# Altium PCB LEDArray8KeyRevB.PcbDoc (part 2 of 4)
Units mm, origin at the board's own origin, x right, y up, seen from the top; angles counter-clockwise.
Board outline 120 x 84.91 mm, 2 copper layers (Top Layer, Bottom Layer); 250 components, 219 nets, 891 pads, 234 vias.
Unrouted connection lines stored in the file: 34.
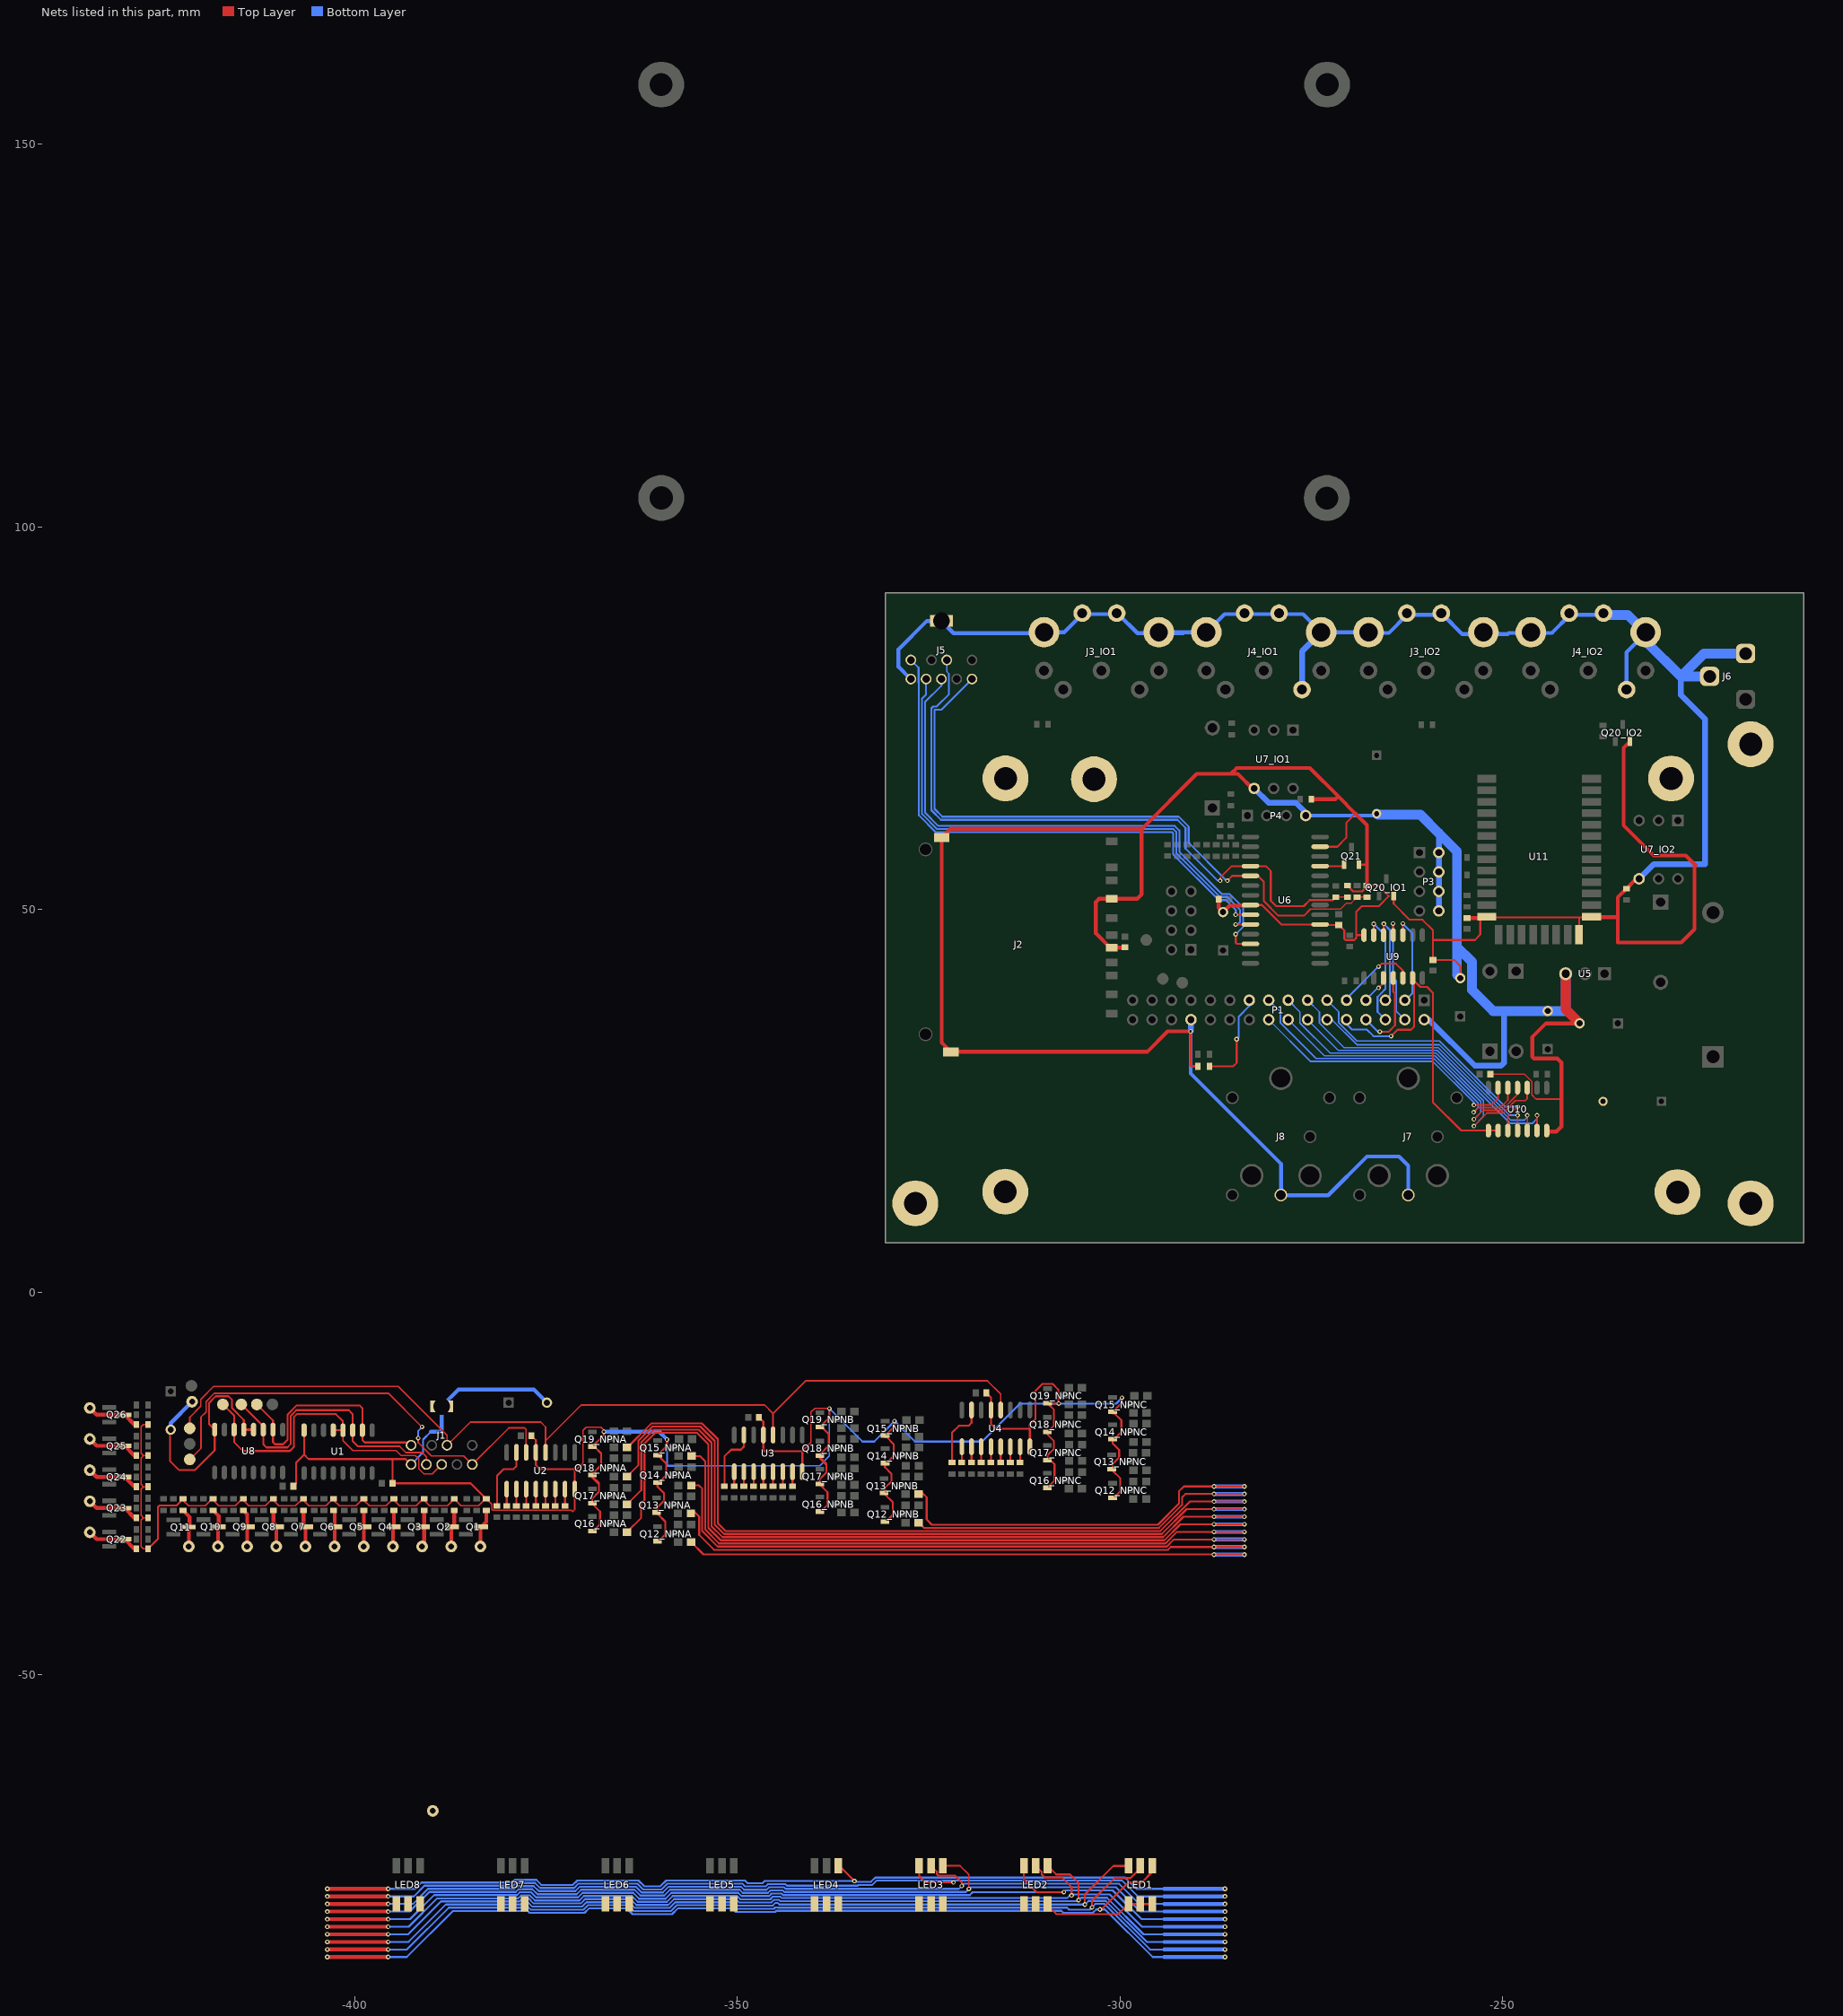
[diagram p2: the nets of this part, all layers, seen from the top]

## Via types
v1: diameter 0.6, hole 0.3, Top Layer to Bottom Layer, 234 vias

## Nets (pads, with @x,y where several pads share a name; then routed paths per layer and width w, separated by ;. In a path a pad name is that pad's centre, name@x,y a point inside that pad or via, vN(x,y) a via of type N, cw(c..) or ccw(c..) an arc to the next point about the centre after c; other vN are vias at no path point) (continued)
B: J1.3 J5.3 pad.0@-412.767,-14.649 U1.2 U6.9 U8.2 | length 104
  Top Layer w0.254: pad.0@-412.767,-14.649 -410.659,-16.757 U8.2@-410.659,-17.943 -410.659,-19.6 -410.405,-19.854 -409.34,-19.854 -408.756,-19.27 -408.756,-15.989 -407.541,-14.774 -399.356,-14.774 -398.975,-15.155 U1.2@-398.975,-18.02 -398.975,-19.321 -398.67,-19.626 -392.994,-19.626 J1.3@-392.622,-19.998 ; v1(-284.878,49.335) U6.9@-282.951,49.335
  Bottom Layer w0.254: J5.3@-327.329,82.618 -326.309,81.598 -326.309,79.669 -326.265,79.626 -326.265,62.324 -324.054,60.112 -293.166,60.112 -293.057,60.003 -293.057,57.222 -287.075,51.24 -286.148,51.24 -284.878,49.97 v1(-284.878,49.335)
B1_NPNA: R3_NPNA.1 U2.15 | length 8.6
  Top Layer w0.254: R3_NPNA.1@-381.398,-27.703 -381.398,-23.981 -380.509,-23.092 -379.239,-23.092 -378.858,-22.711 U2.15@-378.858,-20.919
B1_NPNB: R3_NPNB.1 U3.15 | length 8.7
  Top Layer w0.254: R3_NPNB.1@-351.68,-25.163 -351.68,-21.441 -350.791,-20.552 -349.521,-20.552 -349.14,-20.171 U3.15@-349.14,-18.279
B1_NPNC: R3_NPNC.1 U4.15 | length 8.7
  Top Layer w0.254: R3_NPNC.1@-321.941,-22.049 -321.941,-18.327 -321.052,-17.438 -319.782,-17.438 -319.401,-17.057 U4.15@-319.401,-15.165
B2_NPNA: R6_NPNA.1 U2.1 | length 2
  Top Layer w0.254: R6_NPNA.1@-380.128,-27.703 U2.1@-380.128,-25.719
B2_NPNB: R6_NPNB.1 U3.1 | length 2.1
  Top Layer w0.254: R6_NPNB.1@-350.41,-25.163 U3.1@-350.41,-23.079
B2_NPNC: R6_NPNC.1 U4.1 | length 2.1
  Top Layer w0.254: R6_NPNC.1@-320.671,-22.049 U4.1@-320.671,-19.965
B3_NPNA: R9_NPNA.1 U2.2 | length 2
  Top Layer w0.254: R9_NPNA.1@-378.858,-27.703 U2.2@-378.858,-25.719
B3_NPNB: R9_NPNB.1 U3.2 | length 2.1
  Top Layer w0.254: R9_NPNB.1@-349.14,-25.163 U3.2@-349.14,-23.079
B3_NPNC: R9_NPNC.1 U4.2 | length 2.1
  Top Layer w0.254: R9_NPNC.1@-319.401,-22.049 U4.2@-319.401,-19.965
B4_NPNA: R12_NPNA.1 U2.3 | length 2
  Top Layer w0.254: R12_NPNA.1@-377.588,-27.703 U2.3@-377.588,-25.719
B4_NPNB: R12_NPNB.1 U3.3 | length 2.1
  Top Layer w0.254: R12_NPNB.1@-347.87,-25.163 U3.3@-347.87,-23.079
B4_NPNC: R12_NPNC.1 U4.3 | length 2.1
  Top Layer w0.254: R12_NPNC.1@-318.131,-22.049 U4.3@-318.131,-19.965
B5_NPNA: R15_NPNA.1 U2.4 | length 2
  Top Layer w0.254: R15_NPNA.1@-376.318,-27.703 U2.4@-376.318,-25.719
B5_NPNB: R15_NPNB.1 U3.4 | length 2.1
  Top Layer w0.254: R15_NPNB.1@-346.6,-25.163 U3.4@-346.6,-23.079
B5_NPNC: R15_NPNC.1 U4.4 | length 2.1
  Top Layer w0.254: R15_NPNC.1@-316.861,-22.049 U4.4@-316.861,-19.965
B6_NPNA: R18_NPNA.1 U2.5 | length 2
  Top Layer w0.254: R18_NPNA.1@-375.048,-27.703 U2.5@-375.048,-25.719
B6_NPNB: R18_NPNB.1 U3.5 | length 2.1
  Top Layer w0.254: R18_NPNB.1@-345.33,-25.163 U3.5@-345.33,-23.079
B6_NPNC: R18_NPNC.1 U4.5 | length 2.1
  Top Layer w0.254: R18_NPNC.1@-315.591,-22.049 U4.5@-315.591,-19.965
B7_NPNA: R21_NPNA.1 U2.6 | length 2
  Top Layer w0.254: R21_NPNA.1@-373.778,-27.703 U2.6@-373.778,-25.719
B7_NPNB: R21_NPNB.1 U3.6 | length 2.1
  Top Layer w0.254: R21_NPNB.1@-344.06,-25.163 U3.6@-344.06,-23.079
B7_NPNC: R21_NPNC.1 U4.6 | length 2.1
  Top Layer w0.254: R21_NPNC.1@-314.321,-22.049 U4.6@-314.321,-19.965
B8_NPNA: R24_NPNA.1 U2.7 | length 2
  Top Layer w0.254: R24_NPNA.1@-372.508,-27.703 U2.7@-372.508,-25.719
B8_NPNB: R24_NPNB.1 U3.7 | length 2.1
  Top Layer w0.254: R24_NPNB.1@-342.79,-25.163 U3.7@-342.79,-23.079
B8_NPNC: R24_NPNC.1 U4.7 | length 2.1
  Top Layer w0.254: R24_NPNC.1@-313.051,-22.049 U4.7@-313.051,-19.965
BL_CNT: Q21.2 U6.25 | length 3.2
  Top Layer w0.254: U6.25@-273.851,55.685 -270.879,55.685 Q21.2@-270.698,55.866
C: J1.4 J5.4 pad.0@-414.799,-14.649 U1.3 U6.10 U8.3 | length 108.1
  Top Layer w0.203: -408.79,-20.261 -408.349,-19.82 -408.349,-16.157 ; -394.862,-20.134 -394.098,-20.134 -393.28,-20.952 -391.154,-20.952 -390.622,-21.484 J1.4@-390.622,-22.498
  Top Layer w0.254: pad.0@-414.799,-14.649 -411.929,-17.519 U8.3@-411.929,-17.943 -411.929,-19.854 -411.522,-20.261 -408.79,-20.261 ; -408.349,-16.157 -407.601,-15.409 -400.753,-15.409 -400.245,-15.917 U1.3@-400.245,-18.02 -400.245,-19.448 -399.559,-20.134 -394.862,-20.134 ; v1(-284.878,48.065) U6.10@-282.951,48.065
  Bottom Layer w0.254: J5.4@-325.329,80.118 -325.329,78.117 -325.859,77.588 -325.859,62.493 -323.885,60.519 -292.997,60.519 -292.65,60.172 -292.65,57.39 -286.907,51.647 -285.979,51.647 -284.294,49.961 -284.294,48.395 -284.624,48.065 v1(-284.878,48.065)
CLK: J1.2 J5.2 pad.0@-421.538,-17.78 R76.2 R77.2 U2.12 U3.12 U4.12 U6.4 | length 215.4
  Top Layer w0.178: -272.19,51.24 -271.797,51.633 -270.285,51.633 R77.2@-270.273,51.621
  Top Layer w0.203: pad.0@-421.538,-17.78 -421.538,-16.321 -420.109,-14.892 -420.109,-13.982 -418.46,-12.332 -418.428,-12.332 -418.389,-12.293 -394.318,-12.293 -387.922,-18.69 -387.922,-19.998 -384.883,-16.959 -375.683,-16.959 -375.048,-17.594 -375.048,-19.378 ; U2.12@-375.048,-20.919 -375.048,-19.378 ; U3.12@-345.319,-18.647 -345.319,-15.805 ; U4.12@-315.583,-15.381 -315.583,-13.305 -317.314,-11.574 -341.088,-11.574 -345.319,-15.805 ; -375.048,-19.378 -370.393,-14.724 -346.427,-14.724 -345.346,-15.805 -345.319,-15.805
  Top Layer w0.254: v1(-286.91,53.78) -286.91,54.161 -285.386,55.685 U6.4@-282.951,55.685 -280.941,55.685 -280.293,55.037 -280.293,51.161 -279.585,50.453 -275.996,50.453 -275.209,51.24 -272.19,51.24 -272.164,51.24 R76.2@-271.797,51.608
  Bottom Layer w0.178: J5.2@-322.629,82.618 -322.629,81.093 -322.343,80.806
  Bottom Layer w0.254: -322.343,80.806 -322.343,78.164 -323.968,76.539 -324.402,76.539 -324.64,76.301 -324.64,62.998 -323.38,61.738 -292.492,61.738 -291.431,60.677 -291.431,57.987 -287.224,53.78 v1(-286.91,53.78)
COM1: LED1.1 LED1.3 LED1.5 LED2.1 LED2.3 LED2.5 LED3.1 LED3.3 LED3.5 LED4.1 LED4.3 LED4.5 LED5.1 LED5.3 LED5.5 LED6.1 LED6.3 LED6.5 LED7.1 LED7.3 LED7.5 LED8.1 LED8.3 LED8.5 pad.1@-383.557,-33.215 pad.1@-389.78,-67.759 Q1.3 R47.2 | length 19.9
  Top Layer w0.254: LED2.5@-309.458,-79.93 -309.458,-80.11 -308.322,-81.246 -300.207,-81.246 LED1.1@-298.891,-79.93 LED1.3@-297.341,-79.93 LED1.5@-295.791,-79.93
  Top Layer w0.508: pad.1@-383.557,-33.215 -383.557,-30.76 Q1.3@-383.446,-30.649 -382.795,-29.998 R47.2@-382.795,-28.504
COM2: pad.1@-387.367,-33.215 Q2.3 R48.2 | length 4.9
  Top Layer w0.508: pad.1@-387.367,-33.215 -387.367,-30.76 Q2.3@-387.256,-30.649 -386.986,-30.379 R48.2@-386.986,-28.504
COM3: pad.1@-391.177,-33.215 Q3.3 R49.2 | length 4.8
  Top Layer w0.508: pad.1@-391.177,-33.215 -390.923,-32.961 R49.2@-390.923,-28.504
COM4: pad.1@-394.987,-33.215 Q4.3 R50.2 | length 4.8
  Top Layer w0.508: pad.1@-394.987,-33.215 -394.987,-30.776 Q4.3@-394.86,-30.649 ; Q4.3@-394.876,-30.649 Q4.3@-394.86,-30.649 ; R50.2@-394.86,-28.504 Q4.3@-394.86,-30.649
COM5: pad.1@-398.797,-33.215 Q5.3 R51.2 | length 5
  Top Layer w0.152: Q5.3@-398.797,-30.76 -398.797,-30.649 -398.797,-30.539 Q5.3@-398.686,-30.649 Q5.3@-398.797,-30.76
  Top Layer w0.508: pad.1@-398.797,-33.215 Q5.3@-398.797,-30.76 ; Q5.3@-398.797,-30.539 R51.2@-398.797,-28.504
COM6: pad.1@-402.607,-33.215 Q6.3 R52.2 | length 4.8
  Top Layer w0.508: R52.2@-402.734,-28.504 -402.607,-28.631 pad.1@-402.607,-33.215
COM7: pad.1@-406.417,-33.215 Q7.3 R53.2 | length 4.8
  Top Layer w0.508: R53.2@-406.671,-28.504 -406.671,-30.395 -406.417,-30.649 pad.1@-406.417,-33.215
COM8: pad.1@-410.227,-33.215 Q8.3 R54.2 | length 5
  Top Layer w0.508: R54.2@-410.608,-28.504 -410.608,-30.158 Q8.3@-410.116,-30.649 -410.227,-30.76 pad.1@-410.227,-33.215
COM9: pad.1@-414.037,-33.215 Q9.3 R55.2 | length 4.9
  Top Layer w0.508: R55.2@-414.545,-28.504 -414.037,-29.012 pad.1@-414.037,-33.215
COM10: pad.1@-417.847,-33.215 Q10.3 R56.2 | length 5.1
  Top Layer w0.508: R56.2@-418.482,-28.504 -417.736,-29.25 Q10.3@-417.736,-30.649 -417.847,-30.76 pad.1@-417.847,-33.215
COM11: pad.1@-421.657,-33.215 Q11.3 R57.2 | length 5.1
  Top Layer w0.508: R57.2@-422.419,-28.504 -421.546,-29.377 -421.546,-30.649 -421.657,-30.76 pad.1@-421.657,-33.215
COM12: pad.1@-434.594,-31.369 Q22.3 R87.2 | length 7
  Top Layer w0.508: pad.1@-434.594,-31.369 -433.705,-32.258 Q22.3@-430.038,-32.258 -428.768,-33.528 R87.2@-428.486,-33.528
COM13: pad.1@-434.594,-27.305 Q23.3 R88.2 | length 8.5
  Top Layer w0.254: Q23.3@-430.038,-28.194 R88.2@-428.768,-29.464
  Top Layer w0.508: pad.1@-434.594,-27.305 -433.705,-28.194 Q23.3@-430.038,-28.194 R88.2@-428.768,-29.464
COM14: pad.1@-434.594,-23.241 Q24.3 R89.2 | length 8.5
  Top Layer w0.254: Q24.3@-430.038,-24.13 R89.2@-428.768,-25.4
  Top Layer w0.508: pad.1@-434.594,-23.241 -433.705,-24.13 Q24.3@-430.038,-24.13 R89.2@-428.768,-25.4
COM15: pad.1@-434.594,-19.177 Q25.3 R90.2 | length 8.5
  Top Layer w0.254: Q25.3@-430.038,-20.066 R90.2@-428.768,-21.336
  Top Layer w0.508: pad.1@-434.594,-19.177 -433.705,-20.066 Q25.3@-430.038,-20.066 R90.2@-428.768,-21.336
COM16: pad.1@-434.594,-15.113 Q26.3 R91.2 | length 8.5
  Top Layer w0.254: Q26.3@-430.038,-16.002 R91.2@-428.768,-17.272
  Top Layer w0.508: pad.1@-434.594,-15.113 -433.705,-16.002 Q26.3@-430.038,-16.002 R91.2@-428.768,-17.272
CS: P1.19 R79.2 | length 12.6
  Top Layer w0.254: R79.2@-288.321,29.523 -285.214,29.523 -284.753,29.984 v1(-284.753,33.077)
  Bottom Layer w0.254: v1(-284.753,33.077) -284.497,33.333 -284.497,36 -283.1,37.397 P1.19@-283.1,38.159
D: J1.5 J5.5 pad.0@-417.214,-14.649 U1.4 U1.5 U6.12 U8.6 | length 118.9
  Top Layer w0.203: U1.4@-401.515,-18.02 -401.515,-19.4 -400.226,-20.689 -394.563,-20.689 -393.928,-21.324 -392.068,-21.324 -391.622,-21.77 -391.622,-23.049 -390.934,-23.737 -389.861,-23.737 J1.5@-388.622,-22.498
  Top Layer w0.254: pad.0@-417.214,-15.212 pad.0@-417.214,-14.649 -415.739,-16.124 U8.6@-415.739,-17.943 -415.741,-17.945 -415.741,-19.571 -414.568,-20.743 -408.46,-20.743 -407.946,-20.23 -407.946,-16.329 -407.534,-15.917 -402.453,-15.917 -401.542,-16.828 -401.542,-17.992 U1.4@-401.515,-18.02 U1.5@-402.785,-18.02 ; v1(-284.878,46.795) -284.878,45.652 -284.751,45.525 U6.12@-282.951,45.525
  Bottom Layer w0.254: J5.5@-323.329,80.118 -323.33,79.271 -325.453,77.148 -325.453,62.661 -323.717,60.925 -292.829,60.925 -292.244,60.34 -292.244,57.59 -286.707,52.053 -285.691,52.053 -283.887,50.25 -283.887,47.786 v1(-284.878,46.795)
D0: P1.3 U9.3 | length 12.5
  Top Layer w0.254: U9.3@-263.034,46.674 v1@-263.034,48.169
  Bottom Layer w0.254: v1@-263.034,48.169 v1(-263.036,48.171) -263.036,48.12 -261.791,46.875 -261.791,39.077 -262.709,38.159 P1.3@-262.78,38.159
D1: P1.4 U9.4 | length 14.7
  Top Layer w0.254: U9.4@-264.304,46.674 v1@-264.304,48.153
  Bottom Layer w0.254: v1@-264.304,48.153 v1(-264.322,48.171) -264.322,41.1 -263.925,40.702 -263.925,36.764 P1.4@-262.78,35.619
D2: P1.5 U9.5 | length 12.1
  Top Layer w0.254: U9.5@-265.574,46.674 -265.53,46.718 v1(-265.53,48.145)
  Bottom Layer w0.254: v1(-265.53,48.145) -264.728,47.344 -264.728,38.751 P1.5@-265.32,38.159
D3: P1.6 U9.6 | length 15.5
  Top Layer w0.254: U9.6@-266.844,46.674 v1(-266.844,48.143)
  Bottom Layer w0.254: v1(-266.844,48.143) -265.322,46.621 -265.322,39.636 -265.83,39.128 -265.83,39.105 -266.349,38.586 -266.349,36.649 P1.6@-265.32,35.619
D4: P1.7 U9.10 | length 4.1
  Top Layer w0.254: v1@-266.211,39.89 v1(-266.211,39.763) -265.574,40.4 U9.10@-265.574,41.074
  Bottom Layer w0.254: P1.7@-267.86,38.159 -267.86,38.241 v1@-266.211,39.89
D5: P1.8 U9.11 | length 11.1
  Top Layer w0.254: v1(-266.05,34.048) -264.893,34.048 -264.052,34.89 -264.052,39.001 -264.304,39.253 U9.11@-264.304,41.074
  Bottom Layer w0.254: P1.8@-267.86,35.619 -266.289,34.048 v1(-266.05,34.048)
D6: P1.9 U9.12 | length 10.8
  Top Layer w0.254: v1(-266.211,42.557) -265.83,42.938 -263.925,42.938 -263.034,42.047 U9.12@-263.034,41.074
  Bottom Layer w0.254: P1.9@-270.4,38.159 -270.4,38.368 v1(-266.211,42.557)
D7: P1.10 U9.13 U10.1 U10.2 | length 44.3
  Top Layer w0.254: v1(-264.58,33.469) -264.509,33.54 -263.747,34.302 -261.964,34.302 -261.583,34.683 U9.13@-261.583,40.723 ; U9.13@-261.764,41.074 -261.583,40.893 U9.13@-261.583,40.723 ; U10.2@-250.595,21.135 U10.1@-251.865,21.135 -255.408,21.135 -259.097,24.824 -259.097,39.116 -259.876,39.895 -260.755,39.895 U9.13@-261.583,40.723
  Bottom Layer w0.254: P1.10@-270.687,35.332 -269.685,34.33 -267.735,34.33 -266.873,33.469 v1(-264.58,33.469)
D8: P1.11 U10.3 | length 35.1
  Top Layer w0.203: U10.3@-249.325,21.135 -249.325,22.986 v1(-248.05,24.262)
  Bottom Layer w0.203: P1.11@-272.94,38.159 -271.404,36.623 -271.404,35.203 -269.026,32.825 -258.257,32.825 -249.693,24.262 v1(-248.05,24.262)
D9: P1.12 U10.4 | length 32.1
  Top Layer w0.203: U10.4@-248.055,21.135 -248.05,21.141 v1(-248.05,23.126)
  Bottom Layer w0.203: P1.12@-272.94,35.619 -272.323,35.619 -269.054,32.351 -258.285,32.351 -249.061,23.126 v1(-248.05,23.126)
D10: P1.13 U10.5 | length 38.4
  Top Layer w0.203: U10.5@-246.785,21.135 -246.78,21.141 v1(-246.78,23.126)
  Bottom Layer w0.203: P1.13@-275.48,38.159 -273.944,36.623 -273.944,35.203 -270.706,31.966 -258.403,31.966 -248.929,22.491 -247.161,22.491 -246.78,22.872 v1(-246.78,23.126)
D11: P1.14 U10.6 | length 38.3
  Top Layer w0.203: U10.6@-245.515,21.135 -245.51,21.141 v1(-245.51,23.126)
  Bottom Layer w0.203: P1.14@-275.48,35.619 -271.471,31.61 -258.55,31.61 -249.014,22.074 -246.145,22.074 -245.51,22.709 v1(-245.51,23.126)
D12: P1.15 U10.10 | length 45.5
  Top Layer w0.203: v1(-253.765,21.726) -252.06,23.431 -249.955,23.431 -248.355,25.031 -247.065,25.031 -246.785,25.31 U10.10@-246.785,26.735
  Bottom Layer w0.203: P1.15@-278.02,38.159 -276.484,36.623 -276.484,35.203 -272.535,31.254 -258.698,31.254 -252.5,25.056 -252.5,22.992 v1(-253.765,21.726)
D13: P1.16 U10.11 | length 40.3
  Top Layer w0.203: v1@-253.765,22.575 -252.553,23.787 -250.114,23.787 -248.055,25.846 U10.11@-248.055,26.735
  Bottom Layer w0.203: P1.16@-278.02,35.619 -273.299,30.899 -258.845,30.899 -252.855,24.909 -252.855,23.485 v1@-253.765,22.575
  other v1: -253.765,22.606
D14: P1.17 U10.12 | length 42
  Top Layer w0.203: v1(-253.783,23.525) -253.765,23.507 -253.13,24.142 -250.303,24.142 -249.325,25.12 U10.12@-249.325,26.735
  Bottom Layer w0.203: P1.17@-280.56,38.159 -279.024,36.623 -279.024,35.203 -274.364,30.543 -258.992,30.543 -253.211,24.762 -253.211,24.097 v1(-253.783,23.525)
D15: P1.18 U10.13 | length 36.5
  Top Layer w0.203: v1(-253.765,24.472) -253.739,24.498 -251.451,24.498 -250.595,25.353 U10.13@-250.595,26.735
  Bottom Layer w0.203: P1.18@-280.56,35.619 -275.099,30.158 -259.11,30.158 -253.765,24.813 v1(-253.765,24.472)
DAT: J1.9 J5.9 pad.0@-421.538,-21.844 R74.2 R75.2 U2.14 U6.5 | length 147.8
  Top Layer w0.178: -275.099,50.054 -271.205,50.054 -270.4,50.859 -269.765,50.859 R74.2@-269.003,51.621 -268.991,51.633 R75.2@-267.733,51.633
  Top Layer w0.203: pad.0@-421.538,-21.844 -420.061,-20.367 -420.061,-16.285 -419.398,-15.622 -419.398,-14.291 -418.303,-13.196 -395.575,-13.196 v1(-391.177,-17.594) ; v1(-391.685,-19.049) -391.685,-19.658 -389.963,-21.379 -385.74,-21.379 J1.9@-384.622,-22.498 -379.845,-17.721 -377.771,-17.721 -377.588,-17.904 U2.14@-377.588,-20.919
  Top Layer w0.254: v1@-286.148,53.78 v1(-285.97,53.78) -285.335,54.415 U6.5@-282.951,54.415 -281.957,54.415 -281.195,53.653 -281.195,51.113 -279.29,49.208 -275.945,49.208 -275.099,50.054
  Bottom Layer w0.203: v1(-391.685,-19.049) -391.685,-18.102 v1(-391.177,-17.594)
  Bottom Layer w0.254: J5.9@-319.329,80.118 -323.315,76.132 -324.233,76.132 -324.233,63.166 -323.212,62.144 -292.324,62.144 -291.025,60.845 -291.025,58.733 -286.072,53.78 v1(-285.97,53.78)
GND: C1.2 C2.2 C3.1 C4.1 C5.1 C6.2 C7.2 C8.2 C9.1 C10.1 C11.2 C12.1 C13.1 C14.2 C15.2 C16.2 C17.2 C18.1 C19.1 J1.7 J1.C J2.3 J2.6 J2.GND J3_IO1.C J3_IO2.C J4_IO1.5 J4_IO1.C J4_IO2.5 J4_IO2.C J5.7 J5.C J6.2 J6.3 J7.SLEEVE J8.SLEEVE P1.2 P1.26 P3.2 P3.4 P3.6 P3.8 P4.4 pad.0@-421.234,-14.3 pad.LCD_MNT pad.PCBMNT Q12_NPNA.3 Q12_NPNB.3 Q12_NPNC.3 Q13_NPNA.3 Q13_NPNB.3 Q13_NPNC.3 Q14_NPNA.3 Q14_NPNB.3 Q14_NPNC.3 Q15_NPNA.3 Q15_NPNB.3 Q15_NPNC.3 Q16_NPNA.3 Q16_NPNB.3 Q16_NPNC.3 Q17_NPNA.3 Q17_NPNB.3 Q17_NPNC.3 Q18_NPNA.3 Q18_NPNB.3 Q18_NPNC.3 Q19_NPNA.3 Q19_NPNB.3 Q19_NPNC.3 Q20_IO1.3 Q20_IO2.3 Q21.3 R47.1 R48.1 R49.1 R50.1 R51.1 R52.1 R53.1 R54.1 R55.1 R56.1 R57.1 R60_IO1.2 R60_IO2.2 R75.1 R77.1 R79.1 R87.1 R88.1 R89.1 R90.1 R91.1 U1.8 U2.8 U2.13 U3.8 U3.13 U4.8 U4.13 U5.2 U6.8 U6.19 U6.27 U7_IO1.4 U7_IO2.4 U8.4 U8.5 U8.8 U9.7 U10.7 U11.13 U11.21 U11.22 | length 1143.1
  Top Layer w0.152: R87.1@-426.986,-33.528 -427.586,-33.528 -427.907,-33.207 -427.907,-29.785 -427.586,-29.464 ; R88.1@-426.986,-29.464 -427.586,-29.464 ; R89.1@-426.986,-25.4 -427.586,-25.4 ; R90.1@-426.986,-21.336 -427.586,-21.336 ; R91.1@-426.986,-17.272 -427.586,-17.272 -427.907,-17.593 -427.907,-21.015 -427.586,-21.336 ; R57.1@-422.419,-27.004 -422.419,-27.161 -421.693,-27.887 -419.512,-27.887 -418.629,-27.004 R56.1@-418.482,-27.004 -418.482,-27.161 -417.756,-27.887 -415.575,-27.887 -414.692,-27.004 R55.1@-414.545,-27.004 -414.545,-27.161 -413.819,-27.887 -411.638,-27.887 -410.755,-27.004 R54.1@-410.608,-27.004 -410.608,-27.161 -409.882,-27.887 -407.701,-27.887 -406.818,-27.004 R53.1@-406.671,-27.004 -406.671,-27.161 -405.945,-27.887 -403.764,-27.887 -402.881,-27.004 R52.1@-402.734,-27.004 -402.734,-27.161 -402.008,-27.887 -399.827,-27.887 -398.944,-27.004 R51.1@-398.797,-27.004 -398.797,-27.161 -398.071,-27.887 -395.89,-27.887 -395.007,-27.004 R50.1@-394.86,-27.004 -394.86,-27.161 -394.134,-27.887 -391.953,-27.887 -391.07,-27.004 R49.1@-390.923,-27.004 -390.923,-27.169 -390.204,-27.887 -388.855,-27.887 -388.848,-27.881 -387.875,-27.881 -386.998,-27.004 R48.1@-386.986,-27.004 -386.102,-27.887 -384.664,-27.887 -384.657,-27.881 -383.819,-27.881 -382.942,-27.004 R47.1@-382.795,-27.004 -382.076,-27.722 -382.076,-28.348 -381.942,-28.482 -371.653,-28.482 -371.492,-28.643 ; -370.908,-23.055 -370.146,-22.293 -370.146,-18.026 -369.765,-17.645 -367.809,-17.645 -367.428,-18.026 v1(-367.428,-18.229) ; -341.484,-20.769 -341.063,-20.348 -341.063,-20.34 -340.35,-19.627 -340.35,-15.658 -339.867,-15.176 -338.073,-15.176 v1@-337.969,-15.176 ; -427.586,-29.464 -427.907,-29.143 -427.907,-25.721 -427.586,-25.4 ; -427.586,-25.4 -427.907,-25.079 -427.907,-21.657 -427.586,-21.336 ; Q19_NPNA.3@-368.916,-20.144 -368.916,-20.127 Q19_NPNA.3@-368.916,-20.144
  Top Layer w0.203: -371.492,-28.643 -371.238,-28.389 U2.8@-371.238,-25.719 ; C18.1@-251.615,28.507 -247.153,28.507 -246.181,27.535 -246.181,25.787 -245.637,25.243 -242.549,25.243 -242.333,25.459
  Top Layer w0.254: R87.1@-426.986,-33.528 -425.688,-32.23 -425.688,-28.038 -425.525,-27.874 -423.289,-27.874 R57.1@-422.419,-27.004 ; C15.2@-424.028,-17.949 -424.129,-18.051 -424.129,-22.022 -422.91,-23.241 -420.878,-23.241 -418.279,-20.642 U8.8@-418.279,-17.943 -419.017,-17.205 -419.017,-14.449 -418.145,-13.577 -416.477,-13.577 -416.006,-14.048 -416.006,-15.14 -414.469,-16.678 U8.5@-414.469,-17.943 ; C1.2@-408.003,-25.341 -407.622,-24.96 -407.622,-22.228 -406.595,-21.201 ; U1.8@-406.595,-18.02 -406.595,-21.201 ; J1.7@-392.622,-22.498 -393.335,-21.785 -395.241,-21.785 ; R47.1@-382.795,-27.004 -384.839,-24.96 C2.2@-395.049,-24.96 -395.049,-21.977 -395.241,-21.785 ; C3.1@-376.888,-18.747 -376.318,-19.318 U2.13@-376.318,-20.919 -376.318,-22.584 -375.81,-23.092 -370.945,-23.093 ; U2.8@-371.238,-25.719 -371.238,-23.093 -370.945,-23.093 ; -370.908,-23.055 -370.945,-23.093 ; Q17_NPNA.3@-368.934,-27.639 -367.918,-28.655 -367.918,-30.309 Q16_NPNA.3@-368.802,-31.193 ; Q17_NPNA.3@-368.934,-27.571 -368.934,-26.942 -368.079,-26.087 -368.079,-25.092 -368.934,-24.238 Q18_NPNA.3@-368.934,-23.888 ; -368.079,-25.926 -368.079,-24.931 -368.934,-24.077 -368.934,-23.727 -367.791,-22.584 -367.791,-21.06 -368.707,-20.144 Q19_NPNA.3@-368.916,-20.144 -368.934,-20.144 -368.916,-20.127 -367.7,-18.911 ; -367.919,-19.13 -367.428,-18.639 v1(-367.428,-18.229) ; Q15_NPNA.3@-360.425,-21.465 -360.198,-21.465 -359.282,-22.381 -359.282,-23.905 -360.425,-25.048 -360.425,-25.397 -359.57,-26.251 -359.57,-27.247 -360.425,-28.101 -360.425,-28.96 -359.409,-29.976 -359.409,-31.63 Q12_NPNA.3@-360.293,-32.514 ; v1@-359.194,-19.438 -359.194,-20.064 Q15_NPNA.3@-360.407,-21.277 -359.173,-20.043 v1(-359.173,-19.245) ; C4.1@-347.17,-16.324 -346.589,-16.905 U3.13@-346.589,-18.647 -346.589,-20.631 -346.6,-20.642 -346.473,-20.769 -341.484,-20.769 -341.484,-23.422 U3.8@-341.509,-23.447 ; Q17_NPNB.3@-339.216,-25.099 -338.2,-26.115 -338.2,-27.769 Q16_NPNB.3@-339.084,-28.653 ; Q17_NPNB.3@-339.216,-25.031 -339.216,-24.402 -338.361,-23.547 -338.361,-22.552 ; Q19_NPNB.3@-339.216,-17.604 Q19_NPNB.3@-339.198,-17.604 ; v1@-338.073,-15.176 -337.964,-15.285 -337.964,-16.371 Q19_NPNB.3@-339.198,-17.604 ; Q15_NPNB.3@-330.707,-18.925 -330.48,-18.925 -329.564,-19.841 -329.564,-21.365 -330.707,-22.508 -330.707,-22.857 -329.852,-23.711 -329.852,-24.707 -330.707,-25.561 -330.707,-26.42 -329.691,-27.436 -329.691,-29.09 Q12_NPNB.3@-330.575,-29.974 ; v1@-329.476,-16.898 -329.476,-17.524 Q15_NPNB.3@-330.689,-18.737 -329.455,-17.503 v1(-329.455,-16.832) ; C5.1@-317.452,-13.149 -316.853,-13.747 U4.13@-316.853,-15.381 -316.853,-17.226 -316.23,-17.849 -311.773,-17.849 ; U4.8@-311.773,-20.181 -311.773,-17.849 ; Q16_NPNC.3@-309.477,-25.539 -308.552,-24.614 -308.552,-22.467 -309.102,-21.918 Q17_NPNC.3@-309.477,-21.917 -309.477,-21.288 -308.622,-20.433 -308.622,-19.438 -309.477,-18.584 Q18_NPNC.3@-309.477,-18.234 -308.622,-17.38 -308.622,-15.327 Q19_NPNC.3@-309.403,-14.546 ; Q19_NPNC.3@-309.459,-14.49 Q19_NPNC.3@-309.403,-14.546 ; Q12_NPNC.3@-300.968,-26.86 -300.836,-26.86 -299.952,-25.976 -299.952,-24.322 -300.968,-23.306 -300.968,-22.447 -300.113,-21.593 -300.113,-20.597 -300.968,-19.743 -300.968,-19.394 -299.825,-18.251 -299.825,-16.727 -300.741,-15.811 Q15_NPNC.3@-300.968,-15.811 ; Q15_NPNC.3@-300.95,-15.623 -299.737,-14.41 v1(-299.737,-13.784) ; U6.8@-282.951,50.605 -281.449,50.605 -278.909,48.065 U6.19@-273.851,48.065 -273.786,48 C9.1@-271.416,48 -270.693,47.277 -270.693,46.19 -270.529,46.027 -269.397,46.027 -269.13,46.294 -269.13,46.668 ; U6.27@-273.709,58.367 U6.27@-273.851,58.225 -271.59,58.225 -270.436,59.379 -270.436,61.341 -269.233,62.543 ; R77.1@-270.273,53.121 -269.535,52.383 -268.368,52.383 -267.733,53.018 R75.1@-267.733,53.133 -266.24,53.133 -264.873,51.766 -266.186,50.453 -268.393,50.453 -269.13,49.716 -269.13,46.668 ; Q21.3@-268.798,55.866 -267.841,55.866 -267.783,55.808 -267.733,55.858 ; U9.7@-268.114,46.674 -269.124,46.674 -269.13,46.668 ; Q20_IO1.3@-264.243,51.766 -264.243,50.775 -262.147,48.679 -260.472,48.679 -259.097,47.303 -259.097,46.033 ; C8.2@-255.541,41.051 -255.541,42.632 -256.34,43.431 C13.1@-259.097,43.431 -259.097,46.033 ; U11.21@-240.009,46.728 -240.009,48.979 -240.03,49 ; U11.22@-239.22,49 -240.03,49 ; -406.595,-21.201 -406.01,-21.785 -395.241,-21.785 ; Q18_NPNB.3@-339.216,-21.537 -339.216,-21.698 -338.361,-22.552 ; Q18_NPNB.3@-339.216,-21.537 -339.216,-21.187 -338.073,-20.044 -338.073,-18.52 -338.989,-17.604 Q19_NPNB.3@-339.198,-17.604 ; Q18_NPNB.3@-339.216,-21.537 -338.361,-22.391 -338.361,-22.552 ; -311.773,-17.849 -311.773,-17.311 -311.04,-16.578 -311.04,-12.901 -310.119,-11.98 -308.799,-11.98 -308.063,-12.716 -308.063,-14.474 v1(-307.992,-14.546) Q19_NPNC.3@-309.403,-14.546 ; -259.097,46.033 -253.636,46.033 -252.92,46.749 -252.92,49 -240.809,49 -240.03,49
  Top Layer w0.381: U8.5@-414.469,-17.943 U8.4@-413.199,-17.943 ; v1(-290.763,34.095) -290.763,29.645 -290.642,29.523 R79.1@-289.821,29.523
  Top Layer w0.508: C12.1@-299.356,45.079 -299.418,45.017 -301.256,45.017 -303.163,46.925 -303.163,50.986 -302.732,51.417 -297.748,51.417 -297.163,52.002 -297.163,60.545 ; v1(-290.763,34.095) -293.768,34.095 -296.446,31.417 J2.GND@-322.091,31.417 -323.291,32.617 J2.GND@-323.291,59.417 -322.163,60.545 -297.163,60.545 ; C10.1@-287.102,51.367 -287.102,50.249 C11.2@-286.529,49.676 -285.694,50.511 -283.045,50.511 U6.8@-282.951,50.605 ; U7_IO1.4@-282.465,65.845 -282.465,65.603 -284.6,67.738 -285.513,67.738 ; R60_IO1.2@-274.984,64.448 -271.845,64.448 -271.492,64.802 ; R75.1@-267.733,53.133 -267.733,55.858 -267.733,61.043 -269.233,62.543 -271.492,64.802 ; C19.1@-254.398,48.892 -253.028,48.892 U11.13@-252.92,49 ; U10.7@-244.245,21.135 -244.124,21.014 -242.968,21.014 -242.333,21.649 -242.333,25.459 -242.333,30.031 -242.841,30.539 -245.889,30.539 -246.143,30.793 -246.143,33.333 -244.338,35.138 C6.2@-239.945,35.138 ; U11.22@-239.22,49 -234.967,49 ; Q20_IO2.3@-233.382,71.959 -234.205,71.136 -234.205,61.019 -230.268,57.082 -226.077,57.082 -224.807,55.812 -224.934,55.685 -224.934,47.43 -226.666,45.698 -234.967,45.698 -234.967,49 ; U7_IO2.4@-232.173,54.034 -232.542,54.034 R60_IO2.2@-233.824,52.752 -234.967,51.609 -234.967,49 ; -297.163,60.545 -289.97,67.738 -285.513,67.738 ; -285.513,67.738 -284.739,68.512 -275.202,68.512 -271.492,64.802
  Top Layer w0.762: P1.2@-260.24,35.619 P1.2@-260.214,35.594
  Top Layer w1.27: U5.2@-241.763,41.615 -241.763,36.956 C6.2@-239.945,35.138
  Bottom Layer w0.152: -358.284,-22.674 -339.234,-22.674 -337.964,-21.404 v1(-337.964,-15.181)
  Bottom Layer w0.254: J1.7@-392.622,-22.498 -391.05,-20.926 -391.05,-19.245 -390.034,-18.229 ; v1(-359.173,-19.245) -359.173,-22.674 -358.284,-22.674 ; v1@-337.969,-15.176 v1(-337.964,-15.181) -333.646,-19.499 -332.122,-19.499 v1(-329.455,-16.832) -326.788,-19.499 -318.025,-19.499 -313.072,-14.546 v1(-307.992,-14.546) -300.499,-14.546 v1(-299.737,-13.784)
  Bottom Layer w0.508: C15.2@-424.028,-17.949 -424.028,-17.094 pad.0@-421.234,-14.3 ; -390.034,-18.229 -388.637,-18.229 -388.637,-14.913 -386.424,-12.7 -376.582,-12.7 C14.2@-374.863,-14.419 ; v1(-367.428,-18.229) -360.189,-18.229 v1(-359.173,-19.245) ; J5.7@-327.329,80.118 -328.932,81.721 -328.932,84.006 -325.22,87.718 J5.C@-323.329,87.718 -321.73,86.118 -310.049,86.118 -309.922,86.245 -307.295,86.245 -304.922,88.618 -300.216,88.618 -297.716,86.118 -291.761,86.118 -291.634,86.245 ; J3_IO1.C@-294.922,86.245 -291.634,86.245 ; v1@-290.72,34.139 v1(-290.763,34.095) -290.763,28.594 -278.963,16.794 -278.963,12.683 -272.792,12.683 -267.724,17.751 -263.544,17.751 -262.337,16.544 J7.SLEEVE@-262.337,12.712 ; P4.4@-275.734,62.289 -266.717,62.289 C17.2@-266.463,62.543 ; J4_IO2.C@-236.831,88.513 -241.19,88.513 -243.563,86.14 -249.204,86.14 -249.331,86.013 -255.287,86.013 -257.786,88.513 -262.492,88.513 -264.866,86.14 -267.492,86.14 -267.558,86.206 -267.598,86.245 -273.713,86.245 -276.086,88.618 -286.34,88.618 -288.713,86.245 -291.634,86.245 ; J4_IO2.5@-233.81,78.745 -233.81,83.613 J4_IO2.C@-231.284,86.14
  Bottom Layer w0.762: v1@-290.72,34.139 P1.26@-290.72,35.619 ; U7_IO1.4@-282.465,65.845 -280.57,63.951 -277.004,63.951 -275.734,62.681 P4.4@-275.734,62.289 ; J4_IO1.5@-276.213,78.745 -276.213,83.745 J4_IO1.C@-273.713,86.245 ; P1.2@-260.24,35.619 -259.654,35.619 -253.638,29.603 -250.209,29.603 -249.826,29.986 -249.826,36.755 ; P3.8@-258.335,49.843 P3.6@-258.335,52.383 P3.4@-258.335,54.923 P3.2@-258.335,57.463 -258.335,59.988 ; U7_IO2.4@-232.173,54.034 -230.268,55.939 -223.537,55.939 -223.537,74.862 -226.697,78.023 -226.697,80.45
  Bottom Layer w1.27: C17.2@-266.463,62.543 -266.336,62.416 -260.763,62.416 -258.335,59.988 -255.963,57.616 -255.963,45.144 ; C8.2@-255.541,41.051 -255.963,41.473 -255.963,45.144 ; U5.2@-241.763,41.615 -241.763,36.956 -241.965,36.755 C7.2@-244.111,36.755 -249.826,36.755 -251.245,36.755 -254.017,39.527 -254.017,43.198 -255.963,45.144 ; J4_IO2.C@-236.831,88.513 -233.656,88.513 -231.349,86.206 -231.284,86.14 -231.284,85.036 -226.697,80.45 ; J6.3@-222.953,80.476 -222.978,80.45 -226.697,80.45 ; J6.2@-218.253,83.476 -218.278,83.45 -223.697,83.45 -226.697,80.45
L1: LED1.6 R1_NPNA.1 | length 210.4
  Top Layer w0.254: R1_NPNA.1@-356.019,-32.646 -354.408,-34.256 v1@-283.758,-34.256 ; v1(-302.607,-80.637) -302.531,-80.56 -302.353,-80.56 -298.95,-77.157 -297.197,-77.157 -295.791,-75.751 LED1.6@-295.791,-74.93
  Top Layer w0.5: v1(-403.561,-86.86) v1(-395.617,-86.86)
  Bottom Layer w0.254: v1(-395.617,-86.86) -393.183,-86.86 -387.189,-80.865 -377.338,-80.865 -377.114,-81.09 -369.956,-81.09 -369.376,-80.51 -364.437,-80.51 -363.679,-81.268 -358.527,-81.268 -357.769,-80.51 -350.698,-80.51 -350.241,-80.967 -345.04,-80.967 -344.863,-80.789 -344.837,-80.814 -307.662,-80.814 -307.408,-81.068 -303.54,-81.068 -303.108,-80.637 v1(-302.607,-80.637) -301.947,-80.637 -295.724,-86.86 -294.225,-86.86
  Bottom Layer w0.5: -294.225,-86.86 v1(-286.281,-86.86) ; v1(-287.709,-34.278) v1(-283.737,-34.278)
L2: LED1.4 R4_NPNA.1 | length 213.1
  Top Layer w0.254: R4_NPNA.1@-356.037,-28.77 -355.538,-28.77 -354.982,-29.326 -354.982,-31.714 -353.053,-33.643 -293.721,-33.643 -293.366,-33.287 v1(-283.737,-33.287) ; v1(-303.648,-80.357) -303.648,-79.494 -300.702,-76.547 -298.613,-76.547 -297.341,-75.275 LED1.4@-297.341,-74.93
  Top Layer w0.5: v1(-403.561,-85.869) v1(-395.617,-85.869)
  Bottom Layer w0.254: v1(-395.617,-85.869) -393.158,-85.869 -387.697,-80.408 -378.121,-80.408 -377.74,-80.027 -377.602,-80.027 -376.945,-80.683 -370.124,-80.683 -369.544,-80.103 -364.268,-80.103 -363.51,-80.861 -358.695,-80.861 -357.937,-80.103 -350.53,-80.103 -350.073,-80.56 -345.209,-80.56 -345.031,-80.383 -344.694,-80.383 -344.669,-80.408 -306.9,-80.408 -306.646,-80.662 -303.953,-80.662 v1(-303.648,-80.357) -303.217,-79.925 -302.023,-79.925 -296.079,-85.869 -294.225,-85.869
  Bottom Layer w0.5: -294.225,-85.869 v1(-286.281,-85.869) ; v1(-287.709,-33.287) v1(-283.737,-33.287)
L3: LED1.2 R7_NPNA.1 | length 215.2
  Top Layer w0.254: R7_NPNA.1@-355.993,-25.23 -356.029,-25.233 -355.011,-25.233 -354.575,-25.669 -354.575,-31.196 -352.557,-33.215 -293.868,-33.215 -292.95,-32.297 v1(-283.737,-32.297) ; v1(-304.588,-80.002) -304.588,-78.681 -300.854,-74.947 -298.908,-74.947 LED1.2@-298.891,-74.93
  Top Layer w0.5: v1(-403.561,-84.878) v1(-395.617,-84.878)
  Bottom Layer w0.254: v1(-395.617,-84.878) -392.954,-84.878 -388.078,-80.002 -378.29,-80.002 -377.909,-79.621 -377.433,-79.621 -376.777,-80.277 -370.293,-80.277 -369.712,-79.697 -364.1,-79.697 -363.342,-80.455 -358.863,-80.455 -358.105,-79.697 -350.362,-79.697 -349.93,-80.129 -345.352,-80.129 -344.996,-79.773 -344.729,-79.773 -344.5,-80.002 v1(-304.588,-80.002) -304.106,-79.519 -301.854,-79.519 -296.495,-84.878 -294.225,-84.878
  Bottom Layer w0.5: -294.225,-84.878 v1(-286.281,-84.878) ; v1(-287.709,-32.297) v1(-283.737,-32.297)
L4: LED2.6 R10_NPNA.1 | length 217.1
  Top Layer w0.254: R10_NPNA.1@-356.037,-21.51 R10_NPNA.1@-356.037,-21.411 ; R10_NPNA.1@-355.982,-21.407 R10_NPNA.1@-356.037,-21.411 ; LED2.6@-309.458,-74.93 -308.323,-76.065 -306.528,-76.065 -305.401,-77.192 v1(-305.401,-79.417) ; v1(-283.737,-31.306) -292.534,-31.306 -294.036,-32.808 -352.388,-32.808 -354.169,-31.028 -354.169,-22.111 -354.869,-21.411 R10_NPNA.1@-356.037,-21.411
  Top Layer w0.5: v1(-403.561,-83.888) v1(-395.617,-83.888)
  Bottom Layer w0.254: v1(-395.617,-83.888) -393.005,-83.888 -388.713,-79.595 -378.458,-79.595 -378.077,-79.214 -377.265,-79.214 -376.609,-79.871 -370.461,-79.871 -369.881,-79.29 -363.932,-79.29 -363.174,-80.048 -359.032,-80.048 -358.274,-79.29 -350.193,-79.29 -349.762,-79.722 -345.52,-79.722 -345.164,-79.367 -344.561,-79.367 -344.358,-79.57 -305.553,-79.57 v1(-305.401,-79.417) -305.096,-79.113 -301.686,-79.113 -296.911,-83.888 -294.225,-83.888
  Bottom Layer w0.5: -294.225,-83.888 v1(-286.281,-83.888) ; v1(-287.709,-31.306) v1(-283.737,-31.306)
L5: LED2.4 R13_NPNA.1 | length 238.2
  Top Layer w0.254: R13_NPNA.1@-364.419,-31.32 -362.551,-29.453 -362.551,-27.558 -362.119,-27.126 -362.119,-19.762 -360.723,-18.365 -355.265,-18.365 -353.763,-19.868 -353.763,-30.799 -352.188,-32.374 -352.188,-32.402 -294.205,-32.402 -292.118,-30.315 v1(-283.737,-30.315) ; LED2.4@-311.008,-74.93 -310.237,-75.701 -310.237,-76.046 -309.812,-76.471 -307.56,-76.471 -306.315,-77.716 v1(-306.315,-78.808)
  Top Layer w0.5: v1(-403.561,-82.897) v1(-395.617,-82.897)
  Bottom Layer w0.254: v1(-395.617,-82.897) -392.929,-82.897 -389.221,-79.189 -378.626,-79.189 -378.245,-78.808 -377.097,-78.808 -376.44,-79.464 -370.629,-79.464 -370.049,-78.884 -363.763,-78.884 -363.005,-79.642 -359.2,-79.642 -358.442,-78.884 -350.025,-78.884 -349.593,-79.316 -345.688,-79.316 -345.333,-78.96 -344.392,-78.96 -344.189,-79.163 -306.903,-79.163 -306.547,-78.808 v1(-306.315,-78.808) -306.188,-78.681 -301.337,-78.681 -297.12,-82.897 -294.225,-82.897
  Bottom Layer w0.5: -294.225,-82.897 v1(-286.281,-82.897) ; v1(-287.709,-30.315) v1(-283.737,-30.315)
L6: LED2.2 R16_NPNA.1 | length 235.4
  Top Layer w0.254: R16_NPNA.1@-364.401,-27.703 -362.526,-25.828 -362.526,-19.594 -360.891,-17.959 -355.046,-17.959 -353.356,-19.648 -353.356,-30.57 -351.931,-31.996 -294.373,-31.996 -291.702,-29.325 v1(-283.737,-29.325) ; LED2.2@-312.558,-74.93 -312.558,-76.731 -310.912,-78.376 v1(-307.331,-78.376)
  Top Layer w0.5: v1(-403.561,-81.907) v1(-395.617,-81.907)
  Bottom Layer w0.254: v1(-395.617,-81.907) -392.751,-81.907 -389.602,-78.757 -378.769,-78.757 -378.414,-78.401 -376.928,-78.401 -376.272,-79.058 -370.798,-79.058 -370.217,-78.478 -363.595,-78.478 -362.837,-79.236 -359.368,-79.236 -358.61,-78.478 -349.857,-78.478 -349.45,-78.884 -345.831,-78.884 -345.501,-78.554 -344.224,-78.554 -344.021,-78.757 -319.625,-78.757 -319.244,-78.376 v1(-307.331,-78.376) -307.103,-78.147 -300.956,-78.147 -297.196,-81.907 -294.225,-81.907
  Bottom Layer w0.5: -294.225,-81.907 v1(-286.281,-81.907) ; v1(-287.709,-29.325) v1(-283.737,-29.325)
L7: LED3.6 R19_NPNA.1 | length 230.1
  Top Layer w0.203: -320.912,-74.93 -319.752,-76.09 v1(-319.752,-77.97)
  Top Layer w0.254: R19_NPNA.1@-364.419,-24.081 -362.932,-22.595 -362.932,-19.425 -361.059,-17.553 -354.817,-17.553 -352.95,-19.42 -352.95,-30.361 -351.721,-31.589 -294.541,-31.589 -291.286,-28.334 v1(-283.737,-28.334) ; LED3.6@-323.125,-74.93 -320.912,-74.93
  Top Layer w0.5: v1(-403.561,-80.916) v1(-395.617,-80.916)
  Bottom Layer w0.254: v1(-395.617,-80.916) -392.802,-80.916 -390.237,-78.351 -378.937,-78.351 -378.582,-77.995 -376.76,-77.995 -376.104,-78.651 -370.966,-78.651 -370.386,-78.071 -363.427,-78.071 -362.669,-78.829 -359.537,-78.829 -358.779,-78.071 -349.688,-78.071 -349.282,-78.478 -346,-78.478 -345.669,-78.147 -344.056,-78.147 -343.853,-78.351 -320.133,-78.351 v1(-319.752,-77.97) -319.523,-77.741 -300.524,-77.741 -297.349,-80.916 -294.225,-80.916
  Bottom Layer w0.5: -294.225,-80.916 v1(-286.281,-80.916) ; v1(-287.709,-28.334) v1(-283.737,-28.334)
L8: LED3.4 R22_NPNA.1 | length 226.6
  Top Layer w0.254: R22_NPNA.1@-364.419,-20.261 -364.419,-20.298 -364.38,-20.298 -361.228,-17.146 -354.588,-17.146 -352.543,-19.191 -352.543,-30.192 -351.553,-31.183 -294.71,-31.183 -290.871,-27.344 v1(-283.737,-27.344) ; LED3.4@-324.675,-74.93 -323.904,-75.701 -323.904,-76.046 -323.74,-76.209 -321.555,-76.209 -320.666,-77.098 v1(-320.666,-77.563)
  Top Layer w0.5: v1(-403.561,-79.925) v1(-395.617,-79.925)
  Bottom Layer w0.254: v1(-395.617,-79.925) -392.386,-79.925 -390.405,-77.944 -379.106,-77.944 -378.75,-77.589 -376.592,-77.589 -375.935,-78.245 -371.134,-78.245 -370.554,-77.665 -363.258,-77.665 -362.5,-78.423 -359.705,-78.423 -358.947,-77.665 -349.52,-77.665 -349.114,-78.071 -346.168,-78.071 -345.838,-77.741 -343.887,-77.741 -343.684,-77.944 -321.047,-77.944 v1(-320.666,-77.563) -320.387,-77.284 -300.117,-77.284 -297.476,-79.925 -294.225,-79.925
  Bottom Layer w0.5: -294.225,-79.925 v1(-286.281,-79.925) ; v1(-287.709,-27.344) v1(-283.737,-27.344)
L9: LED3.2 R1_NPNB.1 | length 176.2
  Top Layer w0.254: R1_NPNB.1@-326.301,-30.106 -325.63,-30.776 -294.878,-30.776 -291.89,-27.788 -291.89,-26.81 -291.433,-26.353 v1(-283.737,-26.353) ; LED3.2@-326.225,-74.93 -326.229,-74.934 -326.229,-76.319 -325.442,-77.106 v1(-321.759,-77.106)
  Top Layer w0.5: v1(-403.561,-78.935) v1(-395.617,-78.935)
  Bottom Layer w0.254: v1(-395.617,-78.935) -392.269,-78.935 -390.872,-77.538 -379.274,-77.538 -378.919,-77.182 -376.423,-77.182 -375.767,-77.839 -371.303,-77.839 -370.722,-77.258 -363.09,-77.258 -362.332,-78.016 -359.873,-78.016 -359.115,-77.258 -349.352,-77.258 -348.971,-77.639 -346.311,-77.639 -346.006,-77.335 -343.719,-77.335 -343.516,-77.538 -334.258,-77.538 -334.151,-77.431 -332.358,-77.431 -331.804,-76.877 -321.987,-76.877 v1(-321.759,-77.106) -321.53,-76.877 -299.711,-76.877 -297.654,-78.935 -294.225,-78.935
  Bottom Layer w0.5: -294.225,-78.935 v1(-286.281,-78.935) ; v1(-287.709,-26.353) v1(-283.737,-26.353)
L10: LED4.6 R4_NPNB.1 | length 176
  Top Layer w0.254: LED4.6@-336.792,-74.93 -336.685,-74.93 v1@-334.586,-77.03 ; R4_NPNB.1@-326.319,-26.23 -325.82,-26.23 -325.264,-26.786 -325.264,-29.684 -324.578,-30.37 -295.046,-30.37 -292.297,-27.62 -292.297,-26.023 -291.636,-25.362 v1(-283.737,-25.362)
  Top Layer w0.5: v1(-403.561,-77.944) v1(-395.617,-77.944)
  Bottom Layer w0.254: v1(-395.617,-77.944) -392.065,-77.944 -391.253,-77.131 -379.443,-77.131 -379.087,-76.776 -376.255,-76.776 -375.599,-77.432 -371.471,-77.432 -370.891,-76.852 -362.922,-76.852 -362.164,-77.61 -360.042,-77.61 -359.284,-76.852 -349.009,-76.852 -348.654,-77.208 -346.7,-77.208 -346.42,-76.928 v1(-334.687,-76.928) ; v1@-334.586,-77.03 -334.324,-77.03 -334.319,-77.025 -332.526,-77.025 -331.972,-76.471 -299.33,-76.471 -297.857,-77.944 -294.225,-77.944
  Bottom Layer w0.5: -294.225,-77.944 v1(-286.281,-77.944) ; v1(-287.709,-25.362) v1(-283.737,-25.362)